# EAGLE board shunt-smd (EAGLE 9.3.2)
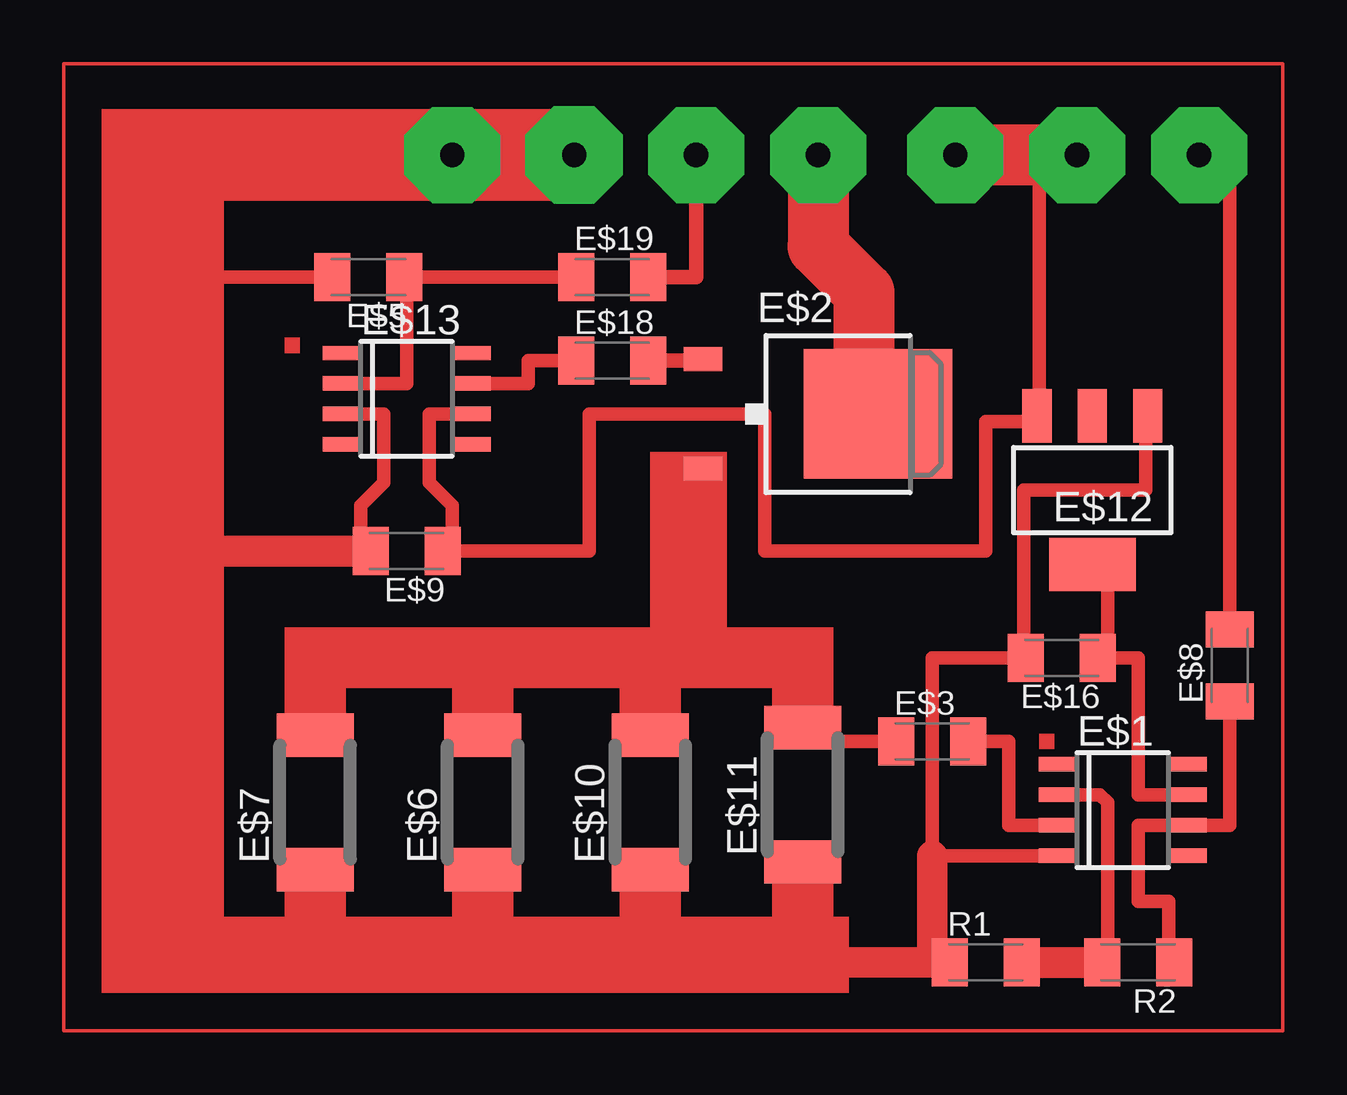
[diagram p0: board, top side]

No outline drawn. Coordinates in mm, seen from the top.
Copper layers (1*16): Top 0.035mm / dielectric 1.5mm / Bottom 0.035mm
Design rules "default": minimum track width 6mil, minimum drill 0.35mm, track to track 6mil, track to pad 6mil, pad to pad 6mil, via to via 6mil, smd to smd 6mil, copper to edge 40mil, drill to drill 6mil, minimum pad ring 10mil, minimum via ring 8mil, stop-mask expansion 4mil, vias tented up to drill 0mil, thermal gap 10mil

## Footprints (pad centres in the part's own frame; a part is rotated, then mirrored left to right if it is on the bottom)
SOIC8 = smd 0.6 x 1.5: 1 -1.905,-2.75; 2 -0.635,-2.75; 3 0.635,-2.75; 4 1.905,-2.75; 5 1.905,2.75; 6 0.635,2.75; 7 -0.635,2.75; 8 -1.905,2.75
TO252 = smd 1 x 1.6: 1 -2.28,-4.8; 2 2.28,-4.8 | smd 5.4 x 6.2: 3 0,2.5
C1206K = smd 1.5 x 2: 1 -1.5,0; 2 1.5,0
R2512 = smd 1.8 x 3.2: 1 -2.8,0; 2 2.8,0
SOT223 = smd 1.219 x 2.235: 1 -2.311,-3.099; 2 0,-3.099; 3 2.311,-3.099 | smd 3.6 x 2.2: 4 0,3.099

## Placement (x,y rotation side)
E$1  mcp601  [SOIC8]  45.09,10.16 270 top
E$2  AOD472  [TO252]  32.38,26.67 270 top
E$3  1k  [C1206K]  37.15,13.02 0 top
E$5  15k  [C1206K]  13.65,32.38 180 top
E$6  0.02R  [R2512]  18.41,10.48 90 top
E$7  0.02R  [R2512]  11.43,10.48 90 top
E$8  1k  [C1206K]  49.53,16.19 90 top
E$9  1mk  [C1206K]  15.24,20.95 180 top
E$10  0.02R  [R2512]  25.4,10.48 90 top
E$11  0.02R  [R2512]  31.75,10.79 90 top
E$12  1117  [SOT223]  43.81,23.5 180 top
E$13  ir4427  [SOIC8]  15.24,27.3 270 top
E$16  1mk  [C1206K]  42.55,16.51 180 top
E$18  1k  [C1206K]  23.81,28.89 0 top
E$19  1k  [C1206K]  23.81,32.38 0 top
R1  330R  [C1206K]  39.37,3.81 0 top
R2  22K  [C1206K]  45.72,3.81 180 top

## Library data of the parts
E$1 E$2 E$13 = linear
E$3 E$5-E$11 E$16 E$18 E$19 R1 R2 = rcl
E$12 = transistor-pnp

## Tracks (layer width: path | path; a pad name or v marks a point on that pad's centre or on a via)
S$1
  Top 0.559: 44.45,20.07 44.45,16.51 45.72,16.51 45.72,10.79 47.62,10.79
S$2
  Top 0.559: 46.99,3.81 46.99,6.35 45.72,6.35 45.72,9.53 49.53,9.53 49.53,14.61
S$3  (via drill 1.02 pad 4.06)
  other vias: 22.23,37.47
S$4
  Top 0.559: 12.7,27.94 15.24,27.94 15.24,32.38 22.23,32.38
S$5  (via drill 1.02 pad 4)
  other vias: 43.18,37.47
S$6
  Top 0.559: 42.55,8.26 37.15,8.26 37.15,16.51 40.96,16.51 40.96,23.5
  Top 1.27: 37.15,8.26 37.15,3.81 33.02,3.81
S$7
  Top 0.152: 51.75,0.95 0.95,0.95 0.95,41.27 51.75,41.27 51.75,0.95
S$8
  Top 0.559: 12.7,26.67 14.29,26.67 14.29,23.81 13.34,22.86 13.34,20.95
S$9
  Top 0.559: 42.55,9.53 40.32,9.53 40.32,13.02 39.05,13.02
S$10  (via drill 1.02 pad 4)
  Top 0.559: 17.78,26.67 16.19,26.67 16.19,23.81 17.14,22.86 17.14,20.95 22.86,20.95 22.86,26.67 30.16,26.67 30.16,20.95 39.37,20.95 39.37,26.35 41.59,26.35 41.59,37.47
  Top 2.54: 43.18,37.47 41.59,37.47 v38.1,37.47
S$11
  Top 0.559: 44.45,3.81 44.45,10.48 44.13,10.79 42.23,10.79
S$12
  Top 0.559: 17.78,27.94 20.32,27.94 20.32,28.89 22.23,28.89
S$13
  Top 0.559: 12.06,32.38 6.99,32.38
S$14
  Top 0.559: 46.04,26.35 46.04,23.5 40.96,23.5
S$16  (via drill 1.02 pad 4)
  Top 0.559: v48.26,37.47 49.53,36.2 49.53,17.78
S$17
  Top 0.61: 27.62,28.89 25.08,28.89
S$18
  Top 0.559: 35.88,13.02 32.07,13.02
S$19  (via drill 1.02 pad 4)
  Top 0.61: 25.08,32.38 27.3,32.38 v27.3,37.47
S$21  (via drill 1.02 pad 4)
  other vias: 17.14,37.47
S$23  (via drill 1.02 pad 4)
  Top 2.54: v32.38,37.47 32.38,33.66 34.29,31.75 34.29,26.04
(copper drawn outside any net)
  shapes: Top area x18